# Altium PCB PCB1.PcbDoc
Units mil, origin at the board's own origin, x right, y up, seen from the top; angles counter-clockwise.
Board outline 4390.03 x 3880.01 mil, 2 copper layers (Top Layer, Bottom Layer); 31 components, 11 nets, 65 pads, 0 vias.
Unrouted connection lines stored in the file: 3.
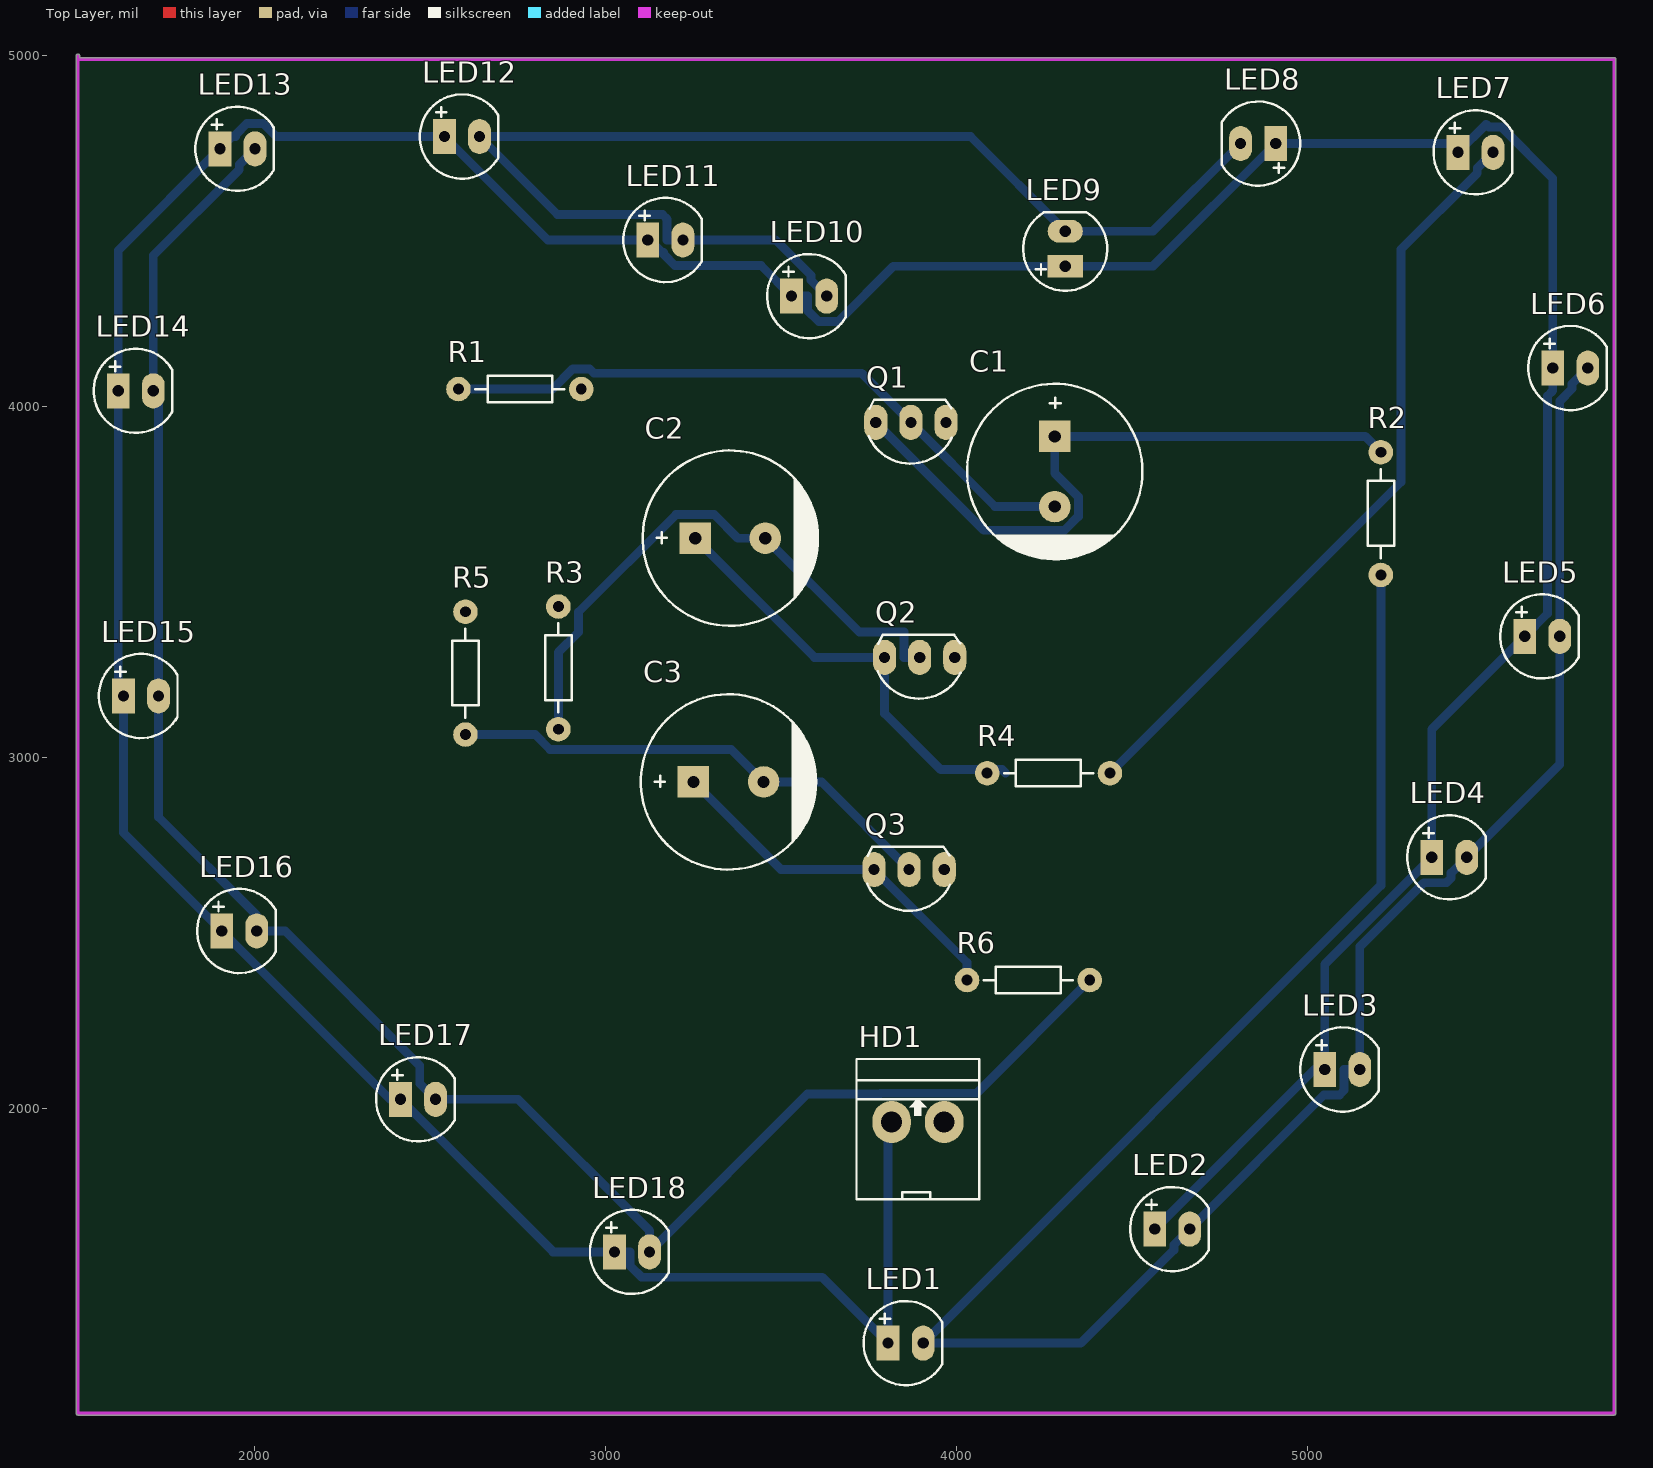
[diagram p0: Top Layer view]
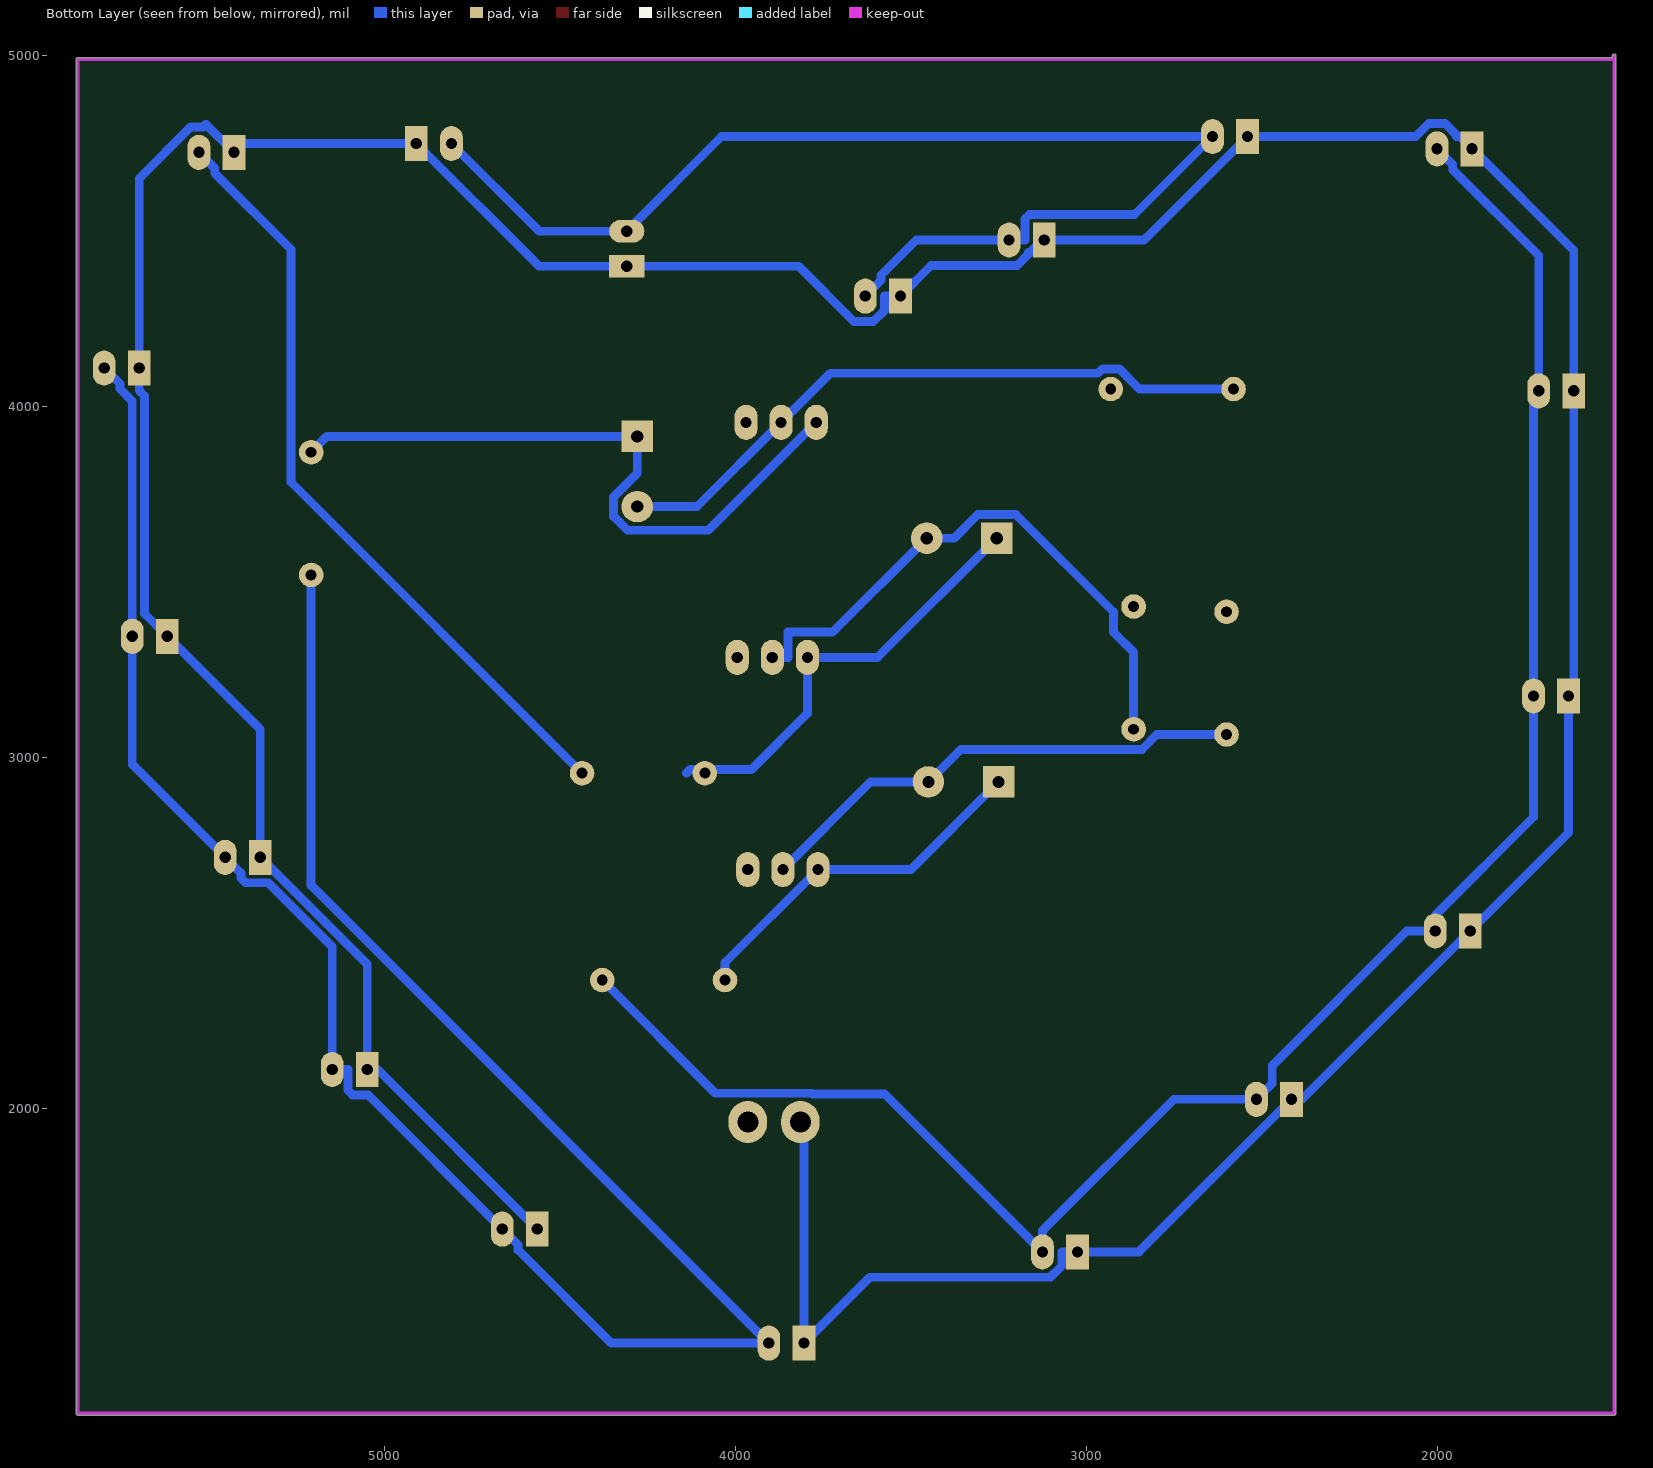
[diagram p1: Bottom Layer view, seen from below]
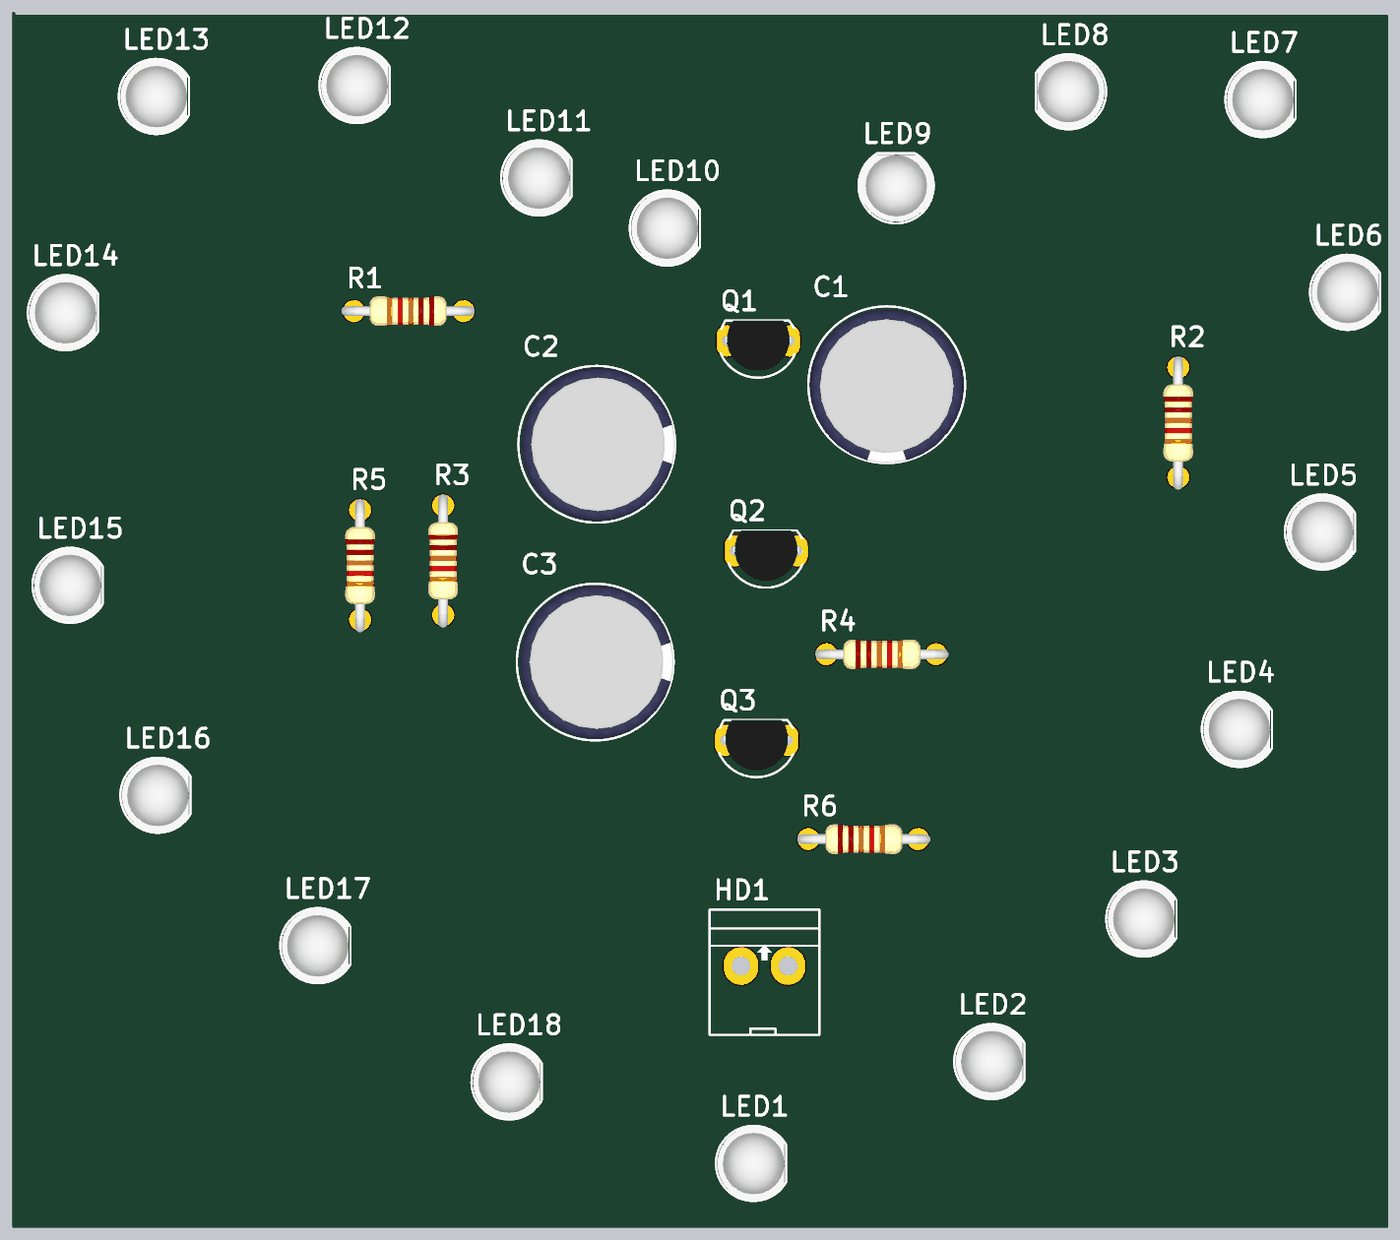
[diagram p2: 3D render of the assembled board from above, using the file's embedded part models]

## Layer stack, top to bottom
Top Solder: solder mask 0.4, Solder Resist, Dk 3.5
Top Layer: signal copper 1.4
Dielectric 1: dielectric 12.6, FR-4, Dk 4.8
Bottom Layer: signal copper 1.4
Bottom Solder: solder mask 0.4, Solder Resist, Dk 3.5

## Board outline
1489.98,1130 ccw(c1495,1130) 1495,1124.98 5875,1124.98 ccw(c5875,1130) 5880.02,1130 5880.02,4990 ccw(c5875,4990) 5875,4995.02 1500.02,4995.02 1500.02,5000 ccw(c1495,5000) 1489.98,5000

## Design rules (kind name [scope] priority, off if disabled: settings)
Clearance [All] p1: gap=10 ignorepadtopadclearanceinfootprint=FALSE except(0: Arc-Hole Track-Hole SMDPad-Hole THPad-Hole Via-Hole Fill-Hole Poly-Hole Region-Hole Text-Hole)
PolygonConnect [All] p1: connectstyle=Relief reliefconductorwidth=10 reliefentries=4 polygonreliefangle="90 Angle" airgapwidth=10
RoomDefinition Sheet1 [InComponentClass('Sheet1')] p1: confinementstyle=ConfineIn formatcopy=TRUE lockcomponents=FALSE outline 7045,1060 16700,1060 16700,1680 7045,1680
RoutingVias [All] p1: holewidth=28 width=50 viastyle="Through Hole" minholewidth=28 minwidth=50 maxholewidth=28 maxwidth=50
SolderMaskExpansion [All] p1: expansion=4
Width [All] p1: maxlimit=25 minlimit=25 preferedwidth=25 minimp=50.000000 maximp=50.000000 favimp=50.000000
30 further rules are at their usual default settings.

## Components (designator, comment, footprint, x,y, rotation, side; value= is the part's Value field where it differs from the comment)
C1 "Cap Pol3" CP2/5 4280,3915 r270 top value=1000pF/35V
C2 "Cap Pol3" CP2/5 3255,3625 r0 top value=1000pF/35V
C3 "Cap Pol3" CP2/5 3250,2930 r0 top value=1000pF/35V
HD1 "Header 2" HED2B 3815,1960 r0 top
LED1 "LED" LED-5-RED 3805,1330 r0 top value="LED 3 ly Single Colour"
LED2 "LED" LED-5-RED 4565,1655 r0 top value="LED 3 ly Single Colour"
LED3 "LED" LED-5-RED 5050,2110 r0 top value="LED 3 ly Single Colour"
LED4 "LED" LED-5-RED 5355,2715 r0 top value="LED 3 ly Single Colour"
LED5 "LED" LED-5-RED 5620,3345 r0 top value="LED 3 ly Single Colour"
LED6 "LED" LED-5-RED 5700,4110 r0 top value="LED 3 ly Single Colour"
LED7 "LED" LED-5-RED 5430,4725 r0 top value="LED 3 ly Single Colour"
LED8 "LED" LED-5-RED 4910,4750 r180 top value="LED 3 ly Single Colour"
LED9 "LED" LED-5-RED 4310,4400 r90 top value="LED 3 ly Single Colour"
LED10 "LED" LED-5-RED 3530,4315 r0 top value="LED 3 ly Single Colour"
LED11 "LED" LED-5-RED 3120,4475 r0 top value="LED 3 ly Single Colour"
LED12 "LED" LED-5-RED 2540,4770 r0 top value="LED 3 ly Single Colour"
LED13 "LED" LED-5-RED 1900,4735 r0 top value="LED 3 ly Single Colour"
LED14 "LED" LED-5-RED 1610,4045 r0 top value="LED 3 ly Single Colour"
LED15 "LED" LED-5-RED 1625,3175 r0 top value="LED 3 ly Single Colour"
LED16 "LED" LED-5-RED 1905,2505 r0 top value="LED 3 ly Single Colour"
LED17 "LED" LED-5-RED 2415,2025 r0 top value="LED 3 ly Single Colour"
LED18 "LED" LED-5-RED 3025,1590 r0 top value="LED 3 ly Single Colour"
Q1 "C9014" QTO-92 3870,3955 r180 top
Q2 "C9014" QTO-92 3895,3285 r180 top
Q3 "C9014" QTO-92 3865,2680 r180 top
R1 "10k" R1/4W 2580,4050 r0 top value="R1/4W - 1K"
R2 "100" R1/4W 5210,3520 r90 top value="R1/4W - 1K"
R3 "10k" R1/4W 2865,3080 r90 top value="R1/4W - 1K"
R4 "100" R1/4W 4437.5,2955 r180 top value="R1/4W - 1K"
R5 "10k" R1/4W 2600,3065 r90 top value="R1/4W - 1K"
R6 "100" R1/4W 4380,2365 r180 top value="R1/4W - 1K"

## Footprints (in the part's own frame and the unit in brackets; to place one, negate y for a bottom-side part, rotate by r counter-clockwise, add the part's x,y. Pads: shape width x height; smd on the part's side, far side on the other; paste and mask are expansions set on the pad)
CP2/5 [mil] "Tu hoa 1000uF/25V,50V"
  rect 90x90 hole 35: 1(0,0)
  round 90 hole 35: 2(200,0)
  silkscreen extent -150,-250 350,250, body extent -142,-246 350,246, height 984
HED2B [mil] "Header 2, 2 pin, hight 300mil, Pin to Pin 150, Colour White"
  oval 110x120 hole 60: 1(0,0) 2(150,0)
  silkscreen extent -100,-220 250,180
LED-5-RED [mil] "LED 2 PIN, 5 ly , Only colour,pin to pin 100mil"
  rect 65x100 hole 32: 1(0,0)
  oval 65x100 hole 32: 2(100,0)
  silkscreen extent -70,-120 154,120, body extent -65,-119 149,118, height 339
QTO-92 [mil] "TO-92"
  oval 66x100 hole 32: 1(-100,0) 2(0,0) 3(100,0)
  silkscreen extent -117,-65 120,118, body extent -109,-66 109,95, height 245
R1/4W [mil] "R 1/4W, 2 Pin, 350mil"
  round 70 hole 31: 1(0,0) 2(350,0)
  silkscreen extent 48,-38 302,38, body extent -40,-47 386,47, height 111

## Part data
C1 C2 C3: library part "Cap Pol3_1", "Polarized Capacitor (Surface Mount)", LatestRevisionDate=17-Jul-2002, LatestRevisionNote="Re-released for DXP Platform.", PackageReference=C0805, Publisher="Altium Limited"
HD1: library part Hed2, "Header 2 (Green)"
LED1 LED2 LED3 LED4 LED5 LED6 LED7 LED8 LED9 LED10 LED11 LED12 LED13 LED14 LED15 LED16 LED17 LED18: "LED Single colour Green and Red"
Q1 Q2 Q3: "PNP 600mW, EBC", =C9012
R1 R2 R3 R4 R5 R6: library part R1/4W, "Resistor 1/4W"

## Nets (pads, with @x,y where several pads share a name; then routed paths per layer and width w, separated by ;. In a path a pad name is that pad's centre, name@x,y a point inside that pad or via, vN(x,y) a via of type N, cw(c..) or ccw(c..) an arc to the next point about the centre after c; other vN are vias at no path point)
+: HD1.1 LED1.1 LED2.1 LED3.1 LED4.1 LED5.1 LED6.1 LED7.1 LED8.1 LED9.1 LED10.1 LED11.1 LED12.1 LED13.1 LED14.1 LED15.1 LED16.1 LED17.1 LED18.1 | length 13419.9
  Bottom Layer w25: HD1.1 3805,1950 LED1.1 3617.5,1517.5 3102.22,1517.5 3070,1549.72 3070,1590 LED18.1 2850,1590 LED17.1 2385,2025 LED16.1 1625,2785 LED15.1 1610,3190 LED14.1 1610,4445 LED13.1 1935,4770 1945,4770 1945,4775.28 1977.22,4807.5 2022.78,4807.5 2060.28,4770 LED12.1 2835,4475 LED11.1 3140,4475 3140,4460.5 3160.5,4440 3165,4440 3165,4434.72 3197.22,4402.5 3442.5,4402.5 LED10.1 3575,4315 3575,4274.72 3607.22,4242.5 3662.5,4242.5 3820,4400 LED9.1 4560,4400 LED8.1 5405,4750 LED7.1 5510,4805 5517.5,4797.5 5552.78,4797.5 5700,4650.28 LED6.1 5700,4045.18 5685,4030.18 5685,3410 LED5.1 5355,3080 LED4.1 5050,2410 LED3.1 5020,2110 LED2.1
-: HD1.2 Q1.1 Q3.1
NetC1_1: C1.1 Q1.3 R2.2 | length 1925.8
  Bottom Layer w25: Q1.3 4077.5,3647.5 4307.96,3647.5 4347.5,3687.04 4347.5,3742.96 4280,3810.46 C1.1 5165,3915 R2.2
NetC1_2: C1.2 Q1.2 R1.1 | length 1886.4
  Bottom Layer w25: R1.1 2848.68,4050 2906.18,4107.5 2953.82,4107.5 2966.32,4095 3730,4095 Q1.2 4110,3715 C1.2
NetC2_1: C2.1 Q2.3 R4.2 | length 1256.2
  Bottom Layer w25: C2.1 3595,3285 Q2.3 3795,3125 3955,2965 4130,2965 4140,2955
NetC2_2: C2.2 Q2.2 R3.1 | length 1657.1
  Bottom Layer w25: R3.1 2865,3299.32 2922.5,3356.82 2922.5,3414.32 3200.68,3692.5 3309.32,3692.5 3376.82,3625 C2.2 3722.5,3357.5 3850.5,3357.5 3850.5,3285 Q2.2
NetC3_1: C3.1 Q3.3 R6.2 | length 1043.3
  Bottom Layer w25: C3.1 3500,2680 Q3.3 4030,2415 R6.2
NetC3_2: C3.2 Q3.2 R5.1 | length 1424.5
  Bottom Layer w25: R5.1 2798.68,3065 2841.18,3022.5 3357.5,3022.5 C3.2 3615,2930 Q3.2
NetLED1_2: LED1.2 LED2.2 LED3.2 LED4.2 LED5.2 LED6.2 R2.1 | length 6649
  Bottom Layer w25: R2.1 5210,2635 LED1.2 4354.32,1330 4620,1595.68 4620,1610 LED2.2 5047.5,2037.5 5091.82,2037.5 5105,2050.68 5105,2110 LED3.2 5150,2460.5 5332,2642.5 5396.82,2642.5 5410,2655.68 5410,2670 LED4.2 5720,2980 LED5.2 5720,4015.68 5755,4050.68 5755,4065 LED6.2
NetLED7_2: LED7.2 LED8.2 LED9.2 LED10.2 LED11.2 LED12.2 R4.1 | length 5829.5
  Bottom Layer w25: LED10.2 3585,4360 3585,4374.32 3484.32,4475 LED11.2 3175,4475 3175,4534.32 3161.82,4547.5 2862.5,4547.5 LED12.2 4040,4770 LED9.2 4560,4500 LED8.2 ; R4.1 5267.5,3785 5267.5,4448.18 5485,4665.68 5485,4680 LED7.2
NetLED13_2: LED13.2 LED14.2 LED15.2 LED16.2 LED17.2 LED18.2 R6.1 | length 5612.4
  Bottom Layer w25: LED13.2 1955,4690 1955,4675.68 1710,4430.68 LED14.2 1725,4030 LED15.2 1725,2830 2005,2550 LED16.2 2086.14,2505 2470,2121.14 2470,2070 LED17.2 2750,2025 3125,1650 LED18.2 3575,2040 3780.4,2040 3782.9,2042.5 4057.5,2042.5 R6.1
pads on no net: Q2.1 R1.2 R3.2 R5.2

## Keep-outs
Keep-Out Layer:
  lines w10: 1495,5000 1495,1130 5875,1130 5875,4990 1500,4990